# Altium PCB mainboardDory.PcbDoc (part 1 of 2)
Units mil, origin at the board's own origin, x right, y up, seen from the top; angles counter-clockwise.
Board outline 5000 x 2698.04 mil, 2 copper layers (Top Layer, Bottom Layer); 85 components, 78 nets, 393 pads, 169 vias.
Unrouted connection lines stored in the file: 5.
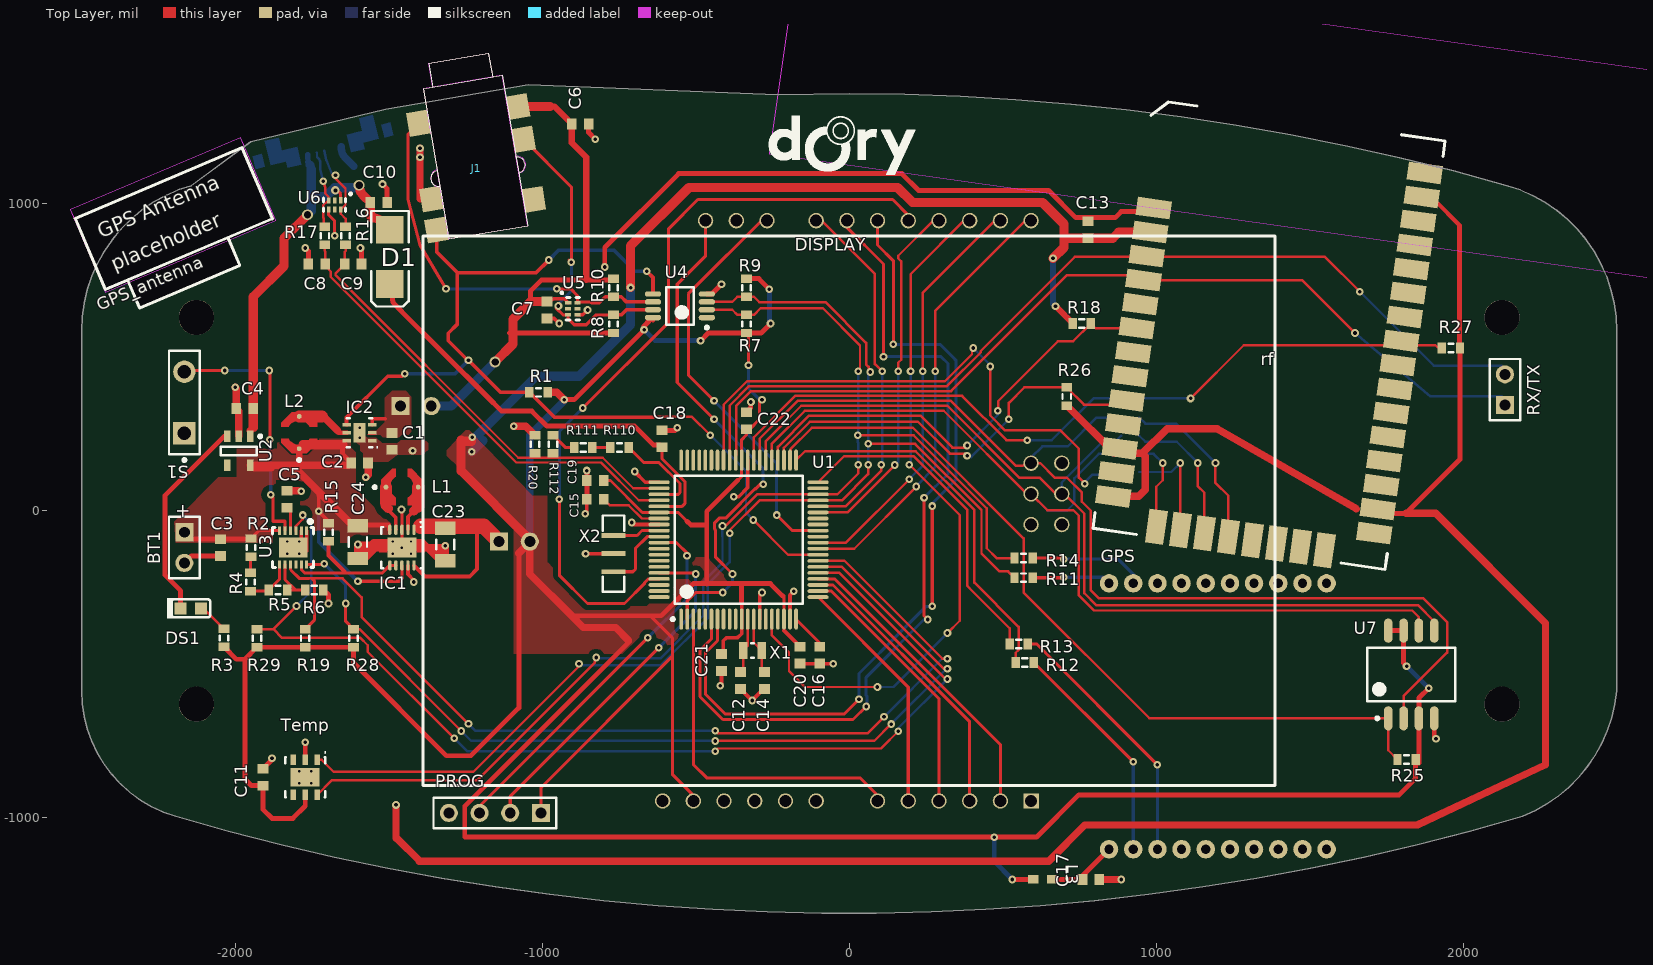
[diagram p0: Top Layer view]
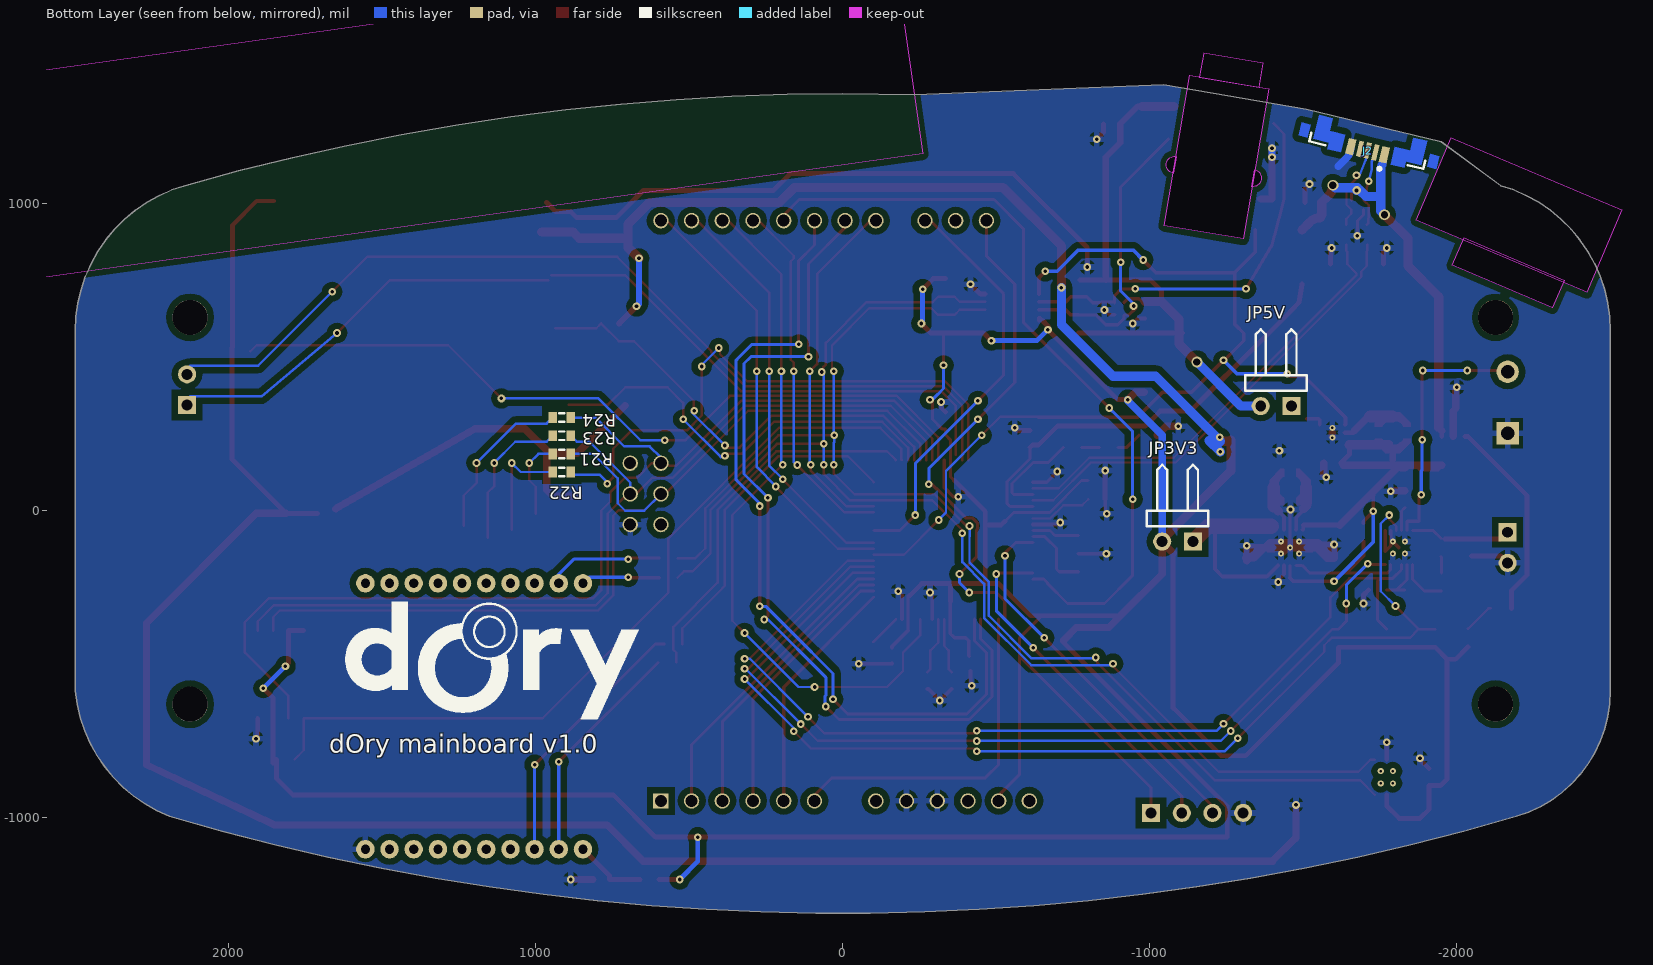
[diagram p1: Bottom Layer view, seen from below]

## Layer stack, top to bottom
Top Solder: solder mask 0.4, Solder Resist, Dk 3.5
Top Layer: signal copper 1.4
Dielectric 1: dielectric 12.6, FR-4, Dk 4.8
Bottom Layer: signal copper 1.4
Bottom Solder: solder mask 0.4, Solder Resist, Dk 3.5

## Board outline
-2142.54,1059.37 -2185.64,1044.92 -2227.22,1026.56 -2266.94,1004.44 -2304.44,978.75 -2339.41,949.72 -2371.55,917.57 -2400.59,882.6 -2426.28,845.1 -2448.4,805.39 -2466.77,763.8 -2481.21,720.7 -2491.62,676.45 -2497.9,631.43 -2500,586.02 -2500,-586.02 -2497.92,-628.14 -2491.69,-669.85 -2481.37,-710.74 -2467.07,-750.41 -2448.93,-788.47 -2427.11,-824.56 -2401.84,-858.32 -2373.36,-889.42 -2341.96,-917.56 -2307.93,-942.46 -2271.6,-963.88 -2233.34,-981.61 -2193.52,-995.48 -2022.28,-1043.67 -1849.99,-1087.92 -1676.73,-1128.23 -1502.59,-1164.57 -1327.67,-1196.92 -1152.05,-1225.26 -975.83,-1249.58 -799.1,-1269.86 -621.96,-1286.1 -444.49,-1298.29 -266.79,-1306.42 -88.94,-1310.49 88.94,-1310.49 266.79,-1306.42 444.49,-1298.29 621.96,-1286.1 799.1,-1269.86 975.83,-1249.58 1152.05,-1225.26 1327.67,-1196.92 1502.59,-1164.57 1676.73,-1128.23 1849.99,-1087.92 2022.28,-1043.67 2193.52,-995.48 2234.29,-976.91 2273.21,-954.71 2309.94,-929.06 2344.2,-900.18 2375.68,-868.3 2404.13,-833.69 2429.32,-796.64 2451.03,-757.45 2469.09,-716.45 2483.34,-673.97 2493.67,-630.38 2500,-586.02 2500,586.02 2497.9,631.43 2491.62,676.45 2481.21,720.7 2466.77,763.8 2448.41,805.39 2426.29,845.1 2400.59,882.6 2371.55,917.57 2339.41,949.72 2304.44,978.75 2266.93,1004.44 2227.22,1026.56 2185.64,1044.92 2142.54,1059.37 1968.03,1106.84 1792.48,1150.27 1615.97,1189.64 1438.59,1224.91 1260.45,1256.09 1081.64,1283.14 902.25,1306.05 722.38,1324.81 542.12,1339.42 361.57,1349.85 180.84,1356.12 0,1358.21 -232.34,1354.76 -1044.77,1387.55 -1509.14,1308.05 -1949.23,1201.71

## Design rules (kind name [scope] priority, off if disabled: settings)
AssemblyTestPointUsage SilkToBoardRegionClearance [All] p2:
Clearance Clearance_1 [InNamedPolygon('3v3poly')] p1: gap=16
Clearance VsysClearance [InNamedPolygon('vsysBATT')] p2: gap=20
Clearance GNDClearance [InNamedPolygon('Bottom_GND')] p3: gap=20
Clearance [All] p4: gap=6
DiffPairsRouting DiffPairUSB_DiffPairsRouting [InDifferentialPair ('USBD') Or InDifferentialPair ('USB')] p1: maxlimit=7.5 minlimit=7.5 mostfreqgap=7.5 toplayer_minwidth=7.5 toplayer_maxwidth=7.5 toplayer_prefwidth=7.5 bottomlayer_minwidth=7.5 bottomlayer_maxwidth=7.5 bottomlayer_prefwidth=7.5 maxuncoupledlength=500
DiffPairsRouting [All] p2: maxlimit=10 minlimit=7.5 mostfreqgap=7.5 toplayer_minwidth=7.5 toplayer_maxwidth=10 toplayer_prefwidth=7.5 bottomlayer_minwidth=7.5 bottomlayer_maxwidth=10 bottomlayer_prefwidth=7.5 maxuncoupledlength=150
HoleSize [All] p1: absolutevalues=TRUE maxlimit=250 minlimit=11.81 maxpercent=80.000 minpercent=20.000
MatchedLengths DiffPairUSB_MatchedLengths [InDifferentialPair ('USBD') Or InDifferentialPair ('USB')] p1: tolerance=100 checknetsindiffpair=TRUE checkdiffpairvsdiffpair=FALSE checkothers=FALSE
MatchedLengths DiffPair_DIFF100MatchedLengths [InDifferentialPairClass('DIFF100')] p2: tolerance=100 checknetsindiffpair=TRUE checkdiffpairvsdiffpair=FALSE checkothers=FALSE
MinimumAnnularRing [All] p1: minimumring=6
MinimumSolderMaskSliver [All] p1: minsoldermaskwidth=6
MinimumSolderMaskSliver SilkscreenOverComponentPads_1 [All] p2: minsoldermaskwidth=10
MinimumSolderMaskSliver SilkToSolderMaskClearance [IsPad] p3: minsoldermaskwidth=6
MinimumSolderMaskSliver SilkscreenOverComponentPads [All] p4: minsoldermaskwidth=10
PlaneClearance VSYSClearanceRule [InNet('V_SYS')] p1: clearance=20
PlaneClearance [All] p2: clearance=20
PolygonConnect GNDPlaneConnectRule [All vs IsNamedPolygon('Bottom_GND')] p1: connectstyle=Relief reliefconductorwidth=20 reliefentries=4 polygonreliefangle="90 Angle" airgapwidth=12
PolygonConnect [All] p2: connectstyle=Direct reliefconductorwidth=10 reliefentries=4 polygonreliefangle="90 Angle" airgapwidth=10
RoutingVias PowerVias [InNet('+5')        or InNet('5Vout')] p1: holewidth=23.62 width=35.43 viastyle="Through Hole" minholewidth=11.81 minwidth=25 maxholewidth=59.06 maxwidth=98.43
RoutingVias [All] p2: holewidth=11.81 width=25 viastyle="Through Hole" minholewidth=11.81 minwidth=25 maxholewidth=28 maxwidth=50
SilkToBoardRegionClearance SilkToBoardRegionClearance_1 [All] p1:
SilkToSilkClearance [All] p1: silktosilkclearance=0
SilkToSolderMaskClearance SilkToSolderMaskClearance_1 [IsPad] p1: minsilkscreentomaskgap=0 clearancetoexposedcopper=TRUE
SolderMaskExpansion [All] p1: expansion=4
Width Width_5V [(InNet('+5') OR InNet('5VOUT'))   OR InNet('V_sys')] p1: maxlimit=50 minlimit=10 preferedwidth=16 minimp=50.000000 maximp=50.000000 favimp=50.000000
Width Width_GND [InNet('GND')] p2: maxlimit=50 minlimit=10 preferedwidth=16 bottomlayer_minwidth=12 minimp=50.000000 maximp=50.000000 favimp=50.000000
Width Width_3V3 [InNet('VCC')] p3: maxlimit=50 minlimit=8 preferedwidth=12 minimp=50.000000 maximp=50.000000 favimp=50.000000
Width [All] p4: maxlimit=100 minlimit=7 preferedwidth=10 minimp=50.000000 maximp=50.000000 favimp=50.000000
22 further rules are at their usual default settings.

## Classes and differential pairs
net class highSpeed: RX_FROM_GPS RX_FROM_ZIGBEE SCL SCL5V SDA SDA5V SPI_MISO SPI_MOSI SPI_SCK TX_TO_GPS TX_TO_ZIGBEE
net class POWER: 5VOUT +5 V_SYS
differential pair class DIFF90: USB USBD
differential pair USBD: +USBD_P -USBD_N
differential pair USB: +USB_P -USB_N

## Components (designator, comment, footprint, x,y, rotation, side; value= is the part's Value field where it differs from the comment)
BT1 "Battery" BAT-2 -2165.35,-119.8 r270 top
C1 "Cap Semi" 1608[0603] -1489,226 r90 top
C2 "Cap Semi" 1608[0603] -1594.49,155.8 r180 top
C3 "Cap Semi" 1608[0603] -2047.24,-119.8 r90 top
C4 "Cap Semi" 1608[0603] -1968.5,332.96 r0 top
C5 "Cap Semi" 1608[0603] -1830.71,37.68 r270 top
C6 "Cap Semi" 1608[0603] -875.98,1259.84 r180 top
C7 "Cap Semi" 1608[0603] -984,654 r90 top
C8 "Cap Semi" 1608[0603] -1733.87,803.2 r0 top
C9 "Cap Semi" 1608[0603] -1615.76,803.2 r180 top
C10 "Cap Semi" 1608[0603] -1532.58,1004.36 r180 top
C11 "Cap Semi" 1608[0603] -1909.45,-867.83 r270 top
C12 "Cap Semi" 1608[0603] -354.33,-552.87 r90 top
C13 "Cap Semi" 1608[0603] 777.56,915.35 r270 top
C14 "Cap Semi" 1608[0603] -275.59,-552.87 r90 top
C15 "Cap Semi" 1608[0603] -826.77,37.68 r180 top
C16 "Cap Semi" 1608[0603] -96,-470 r270 top
C17 "Cap Semi" 1608[0603] 787.4,-1200.79 r180 top
C18 "Cap Semi" 1608[0603] -610.24,234.54 r270 top
C19 "Cap Semi" 1608[0603] -826.77,98.43 r180 top
C20 "Cap Semi" 1608[0603] -160,-470 r90 top
C21 "Cap Semi" 1608[0603] -416,-494 r90 top
C22 "Cap Semi" 1608[0603] -334.65,293.59 r270 top
C23 "Cap Semi" C1206 -1316,-110 r90 top
C24 "Cap Semi" C1206 -1600,-102 r270 top
D1 "D Schottky" SMB -1496.06,826.77 r270 top
DISPLAY "Seeed Studio Display Shield" "Display shield" 0,0 r180 top locked
DS1 "TLSU1008A(T04)" TOSH-0603LED_RED_V -2144,-318 r0 top
GPS "GPS Bee Seeedstudio" "GPS bee" 1437.01,-708.66 r90 top locked
GPS_antenna "GPS_ant_dummy" GPS_ant_dummy -2150.39,835.83 r23 top locked
IC1 "TPS63001DRCR" DRC10-2400X1650TP -1456.69,-119.8 r270 top
IC2 "TPS61240DRVT" DRV6-1600X1000TP -1594.49,254.22 r180 top
J1 "Jack_6" Jack_6_socket -1258.66,1396.06 r279.64 top locked
J2 "micro_USB" DX4RNW5HJ3 -1729.13,1254.72 r13.6 bottom locked
JP3V3 "Header 2H" HDR1X2H -1140.16,-100.11 r0 bottom
JP5V "Header 2H" HDR1X2H -1461,341 r0 bottom
L1 "SRU2013-2R2Y" BOUR-SRU2013-2R2Y-2_V -1456.69,77.05 r90 top
L2 "SRU2013-1R0Y" BOUR-SRU2013-2R2Y-2_V -1791.34,254.22 r180 top
L3 "742861210" SMD-0603 629.92,-1200.79 r0 top
PROG "Header 4" HDR1X4 -1003.94,-984.25 r180 top
R1 "Res3" J1-0603 -1012,386 r180 top
R2 "Res3" J1-0603 -1948.82,-119.8 r90 top
R3 "Res3" J1-0603 -2036,-414 r90 top
R4 "Res3" J1-0603 -1950,-232 r90 top
R5 "Res3" J1-0603 -1860.24,-257.59 r180 top
R6 "Res3" J1-0603 -1742.13,-257.59 r180 top
R7 "Res3" J1-0603 -334.65,608.55 r270 top
R8 "Res3" J1-0603 -767.72,608.55 r270 top
R9 "Res3" J1-0603 -334.65,726.66 r90 top
R10 "Res3" J1-0603 -767.72,726.66 r90 top
R11 "Res3" J1-0603 568,-218 r0 top
R12 "Res3" J1-0603 572,-494 r180 top
R13 "Res3" J1-0603 552,-434 r180 top
R14 "Res3" J1-0603 568,-154 r0 top
R15 "Res3" J1-0603 -1696,-70 r90 top
R16 "Res3" J1-0603 -1639.89,896.11 r270 top
R17 "Res3" J1-0603 -1707.89,896.11 r270 top
R18 "Res3" J1-0603 757.87,610.24 r0 top
R19 "Res3" J1-0603 -1771.65,-415.07 r270 top
R20 "Res3" J1-0603 -1023.62,216.54 r90 top
R21 "Res3" J1-0603 915.35,185.32 r0 bottom
R22 "Res3" J1-0603 915.35,126.27 r0 bottom
R23 "Res3" J1-0603 915.35,244.38 r0 bottom
R24 "Res3" J1-0603 915.35,303.43 r0 bottom
R25 "Res3" J1-0603 1815.46,-810 r0 top
R26 "Res3" J1-0603 708.66,372.33 r90 top
R27 "Res3" J1-0603 1960,530 r180 top
R28 "Res3" J1-0603 -1614.17,-415.07 r270 top
R29 "Res3" J1-0603 -1929.13,-415.07 r270 top
R110 "Res3" J1-0603 -748.03,206.69 r180 top
R111 "Res3" J1-0603 -866.14,206.69 r180 top
R112 "Res3" J1-0603 -964.57,216.54 r270 top
rf "XBee ZigBee S2C surface mount" "S2C XBEE" 1024.61,1220.47 r352 top locked
RX/TX "Header 2" HDR1X2 2135.83,344.49 r90 top
S1 "SW-PB" SPST-2 -2165.35,352.65 r90 top
Temp "Si7055" Si7050/3/4/5 -1771.65,-867.83 r270 top
U1 "MSP430F5529IPN" TI-PN80_N -360,-94 r90 top
U2 "MAX1555EZK-T" MAXM-Z5-1_N -1988.19,195.17 r270 top
U3 "LTC2953IDD-1#PBF" LT-DD-12_V -1811.02,-119.8 r270 top
U4 "PCA9515DP" TSOP65P490X110-8N -551.18,667.61 r180 top
U5 "TPD2E001DRYR" DRY6 -900,658 r0 top
U6 "TPD2E001DRYR" DRY6 -1675.89,996.11 r270 top
U7 "SST25VF064C-80-4I-S3AE" MCHP-SOIC-S3A8_M 1830.71,-533.18 r90 top
X1 "FC - 12M 32.768kHz crystal" FC-12M -314.96,-454.44 r180 top
X2 "CSTCR4M00G15L99" CSTCR_G15L -767.72,-139.48 r270 top

## Footprints (in the part's own frame and the unit in brackets; to place one, negate y for a bottom-side part, rotate by r counter-clockwise, add the part's x,y. Pads: shape width x height; smd on the part's side, far side on the other; paste and mask are expansions set on the pad)
1608[0603] [mm] "Chip Capacitor, Body 1.6x0.8mm, IPC High Density"
  rect 0.8x0.9 smd: 1(-0.7,0) 2(0.7,0)
  body extent -0.87,-0.48 0.87,0.48, height 1.3
BAT-2 [mm] "Battery; 2 Leads"
  rect 1.5x1.5 hole 0.9: 1(-1.27,0)
  round 1.5 hole 0.9: 2(1.27,0)
  silkscreen extent -2.54,-1.27 2.54,1.27
BOUR-SRU2013-2R2Y-2_V [mm] "Hand Drawn, 2-Leads, Body 2.8x2.8mm"
  round 0.4 smd: 1(0,1.321) 2(0,-1.346)
  Top Layer region: 1.5,-0.5 1.5,-0.5 1.5,-0.5 1.5,-0.5 1.5,-0.5 1.5,-0.5 1.5,-0.82 1.5,-0.82 1.5,-0.82 1.5,-0.82 0.62,-1.7 0.62,-1.7 0.62,-1.7 0.62,-1.7 0.62,-1.7 0.62,-1.7 0.62,-1.7 -0.62,-1.7 -0.62,-1.7 -0.62,-1.7 -0.62,-1.7 -1.5,-0.82 -1.5,-0.82 -1.5,-0.82 -1.5,-0.82 -1.5,-0.5 -1.5,-0.5 -1.5,-0.5 -1.5,-0.5 -1.5,-0.5 -1.5,-0.5 -0.866,-0.5 -0.866,-0.5 -0.866,-0.5 -0.866,-0.5 -0.866,-0.5 -0.866,-0.5 -0.866,-0.5 -0.866,-0.5 -0.866,-0.5 -0.5,-0.866 0,-1 0.5,-0.866 0.866,-0.5 0.866,-0.5 0.866,-0.5 0.866,-0.5 0.866,-0.5 0.866,-0.5 0.866,-0.5 0.866,-0.5 0.866,-0.5 0.866,-0.5
  Top Layer region: -1.5,0.5 -1.5,0.5 -1.5,0.5 -1.5,0.5 -1.5,0.5 -1.5,0.5 -1.5,0.82 -1.5,0.82 -1.5,0.82 -1.5,0.82 -0.62,1.7 -0.62,1.7 -0.62,1.7 -0.62,1.7 -0.62,1.7 -0.62,1.7 -0.62,1.7 0.62,1.7 0.62,1.7 0.62,1.7 0.62,1.7 1.5,0.82 1.5,0.82 1.5,0.82 1.5,0.82 1.5,0.5 1.5,0.5 1.5,0.5 1.5,0.5 1.5,0.5 1.5,0.5 0.866,0.5 0.866,0.5 0.866,0.5 0.866,0.5 0.866,0.5 0.866,0.5 0.866,0.5 0.866,0.5 0.866,0.5 0.5,0.866 0,1 -0.5,0.866 -0.866,0.5 -0.866,0.5 -0.866,0.5 -0.866,0.5 -0.866,0.5 -0.866,0.5 -0.866,0.5 -0.866,0.5 -0.866,0.5 -0.866,0.5
  silkscreen extent -0.13,2.13 0.12,2.37, body extent -1.4,-1.4 1.4,1.4, height 1.5
C1206 [mm] "Chip Capacitor, Body 3.2x1.6mm, IPC High Density"
  rect 1.1x1.7 smd: 1(-1.35,0) 2(1.35,0)
  silkscreen extent -0.4,-0.75 0.4,0.75, body extent -1.7,-0.9 1.7,0.9, height 1.3
CSTCR_G15L [mm]
  rect 0.4x2 smd: 1(-1.5,0) 2(0,0) 3(1.5,0)
  silkscreen extent -3.15,-0.9 3.15,0.9
"Display shield" [mil]
  round 50 hole 39: 3V3(507.5,945) 5V(407.5,945) A0(-92.5,945) A1(-192.5,945) A2(-292.5,945) A3(-392.5,945) A4(-492.5,945) D0(-592.5,-945) D1(-492.5,-945) D2(-392.5,-945) D3(-292.5,-945) D4(-192.5,-945) D5(-92.5,-945) D6(7.5,-945) D7(107.5,-945) D8(267.5,-945) D9(367.5,-945) D10(467.5,-945) GND0(207.5,945) GND1(307.5,945) GND2(-692.5,45) MISO(-592.5,-155) MOSI(-692.5,-55) NC0(-692.5,-155) NC1(-592.5,45) RST(607.5,945) SCK(-592.5,-55) VIN(107.5,945)
  rect 50x50 hole 39: A5(-592.5,945)
  silkscreen extent -1388,-895 1388,895
DRC10-2400X1650TP [mm] "SON, 10-Leads, Body 3x3mm, Pitch 0.5mm, Thermal Pad 2.4x1.65mm, TI Recommended"
  oval 0.85x0.28 smd paste-0.025 mask+0.07: 1(-1.475,1) 2(-1.475,0.5) 3(-1.475,0) 4(-1.475,-0.5) 5(-1.475,-1) 6(1.475,-1) 7(1.475,-0.5) 8(1.475,0) 9(1.475,0.5) 10(1.475,1)
  rect 1.65x2.4 smd paste-0.825 mask+0.07: 11(0,0)
  Top Layer region: -0.391,1.2 -0.111,1.2 -0.111,1.9 -0.391,1.9
  Top Layer region: 0.389,1.9 0.109,1.9 0.109,1.2 0.389,1.2
  Top Layer region: -0.391,-1.9 -0.111,-1.9 -0.111,-1.2 -0.391,-1.2
  Top Layer region: 0.389,-1.2 0.109,-1.2 0.109,-1.9 0.389,-1.9
  silkscreen extent -2.15,-1.7 1.7,1.7, body extent -1.55,-1.55 1.55,1.55, height 1
DRV6-1600X1000TP [mm] "SON, 6-Leads, Body 2x2mm, Pitch 0.65mm, Thermal Pad 1.6x1mm, TI Recommended"
  rect 0.7x0.3 smd paste-0.025 mask+0.07: 1(-1.05,0.65) 2(-1.05,0) 3(-1.05,-0.65) 4(1.05,-0.65) 5(1.05,0) 6(1.05,0.65)
  rect 1x1.6 smd paste-0.5 mask+0.07: 7(0,0)
  silkscreen extent -1.5,-1.2 1.05,1.25, body extent -1.05,-1.05 1.05,1.05, height 0.8
DRY6 [mm] "PSON, 6-Leads, Body 1x1.45mm, Pitch 0.5mm, TI Recommended"
  rect 0.52x0.3 smd paste+0 mask+0.05: 1(-0.385,0.5)
  rect 0.49x0.3 smd paste+0 mask+0.05: 2(-0.385,0) 3(-0.385,-0.5) 4(0.385,-0.5) 5(0.385,0) 6(0.385,0.5)
  silkscreen extent -0.96,-0.91 0.56,1.37, body extent -0.53,-0.75 0.53,0.75, height 0.6
DX4RNW5HJ3 [mm] "USB Micro-AB Connector, 5-Leads, Pitch 0.65mm"
  rect 0.65x1.35 smd: 1(-1.425,2.137) 5(1.425,2.137)
  rect 0.4x1.35 smd: 2(-0.65,2.137) 3(0,2.137) 4(0.65,2.137)
  Top Layer region: -4.61,2.275 -2.1,2.275 -2.1,1.275 -4.61,1.275
  Top Layer region: -4.61,2.275 -3.41,2.275 -3.41,0.175 -4.61,0.175
  Top Layer region: 3.41,2.275 4.61,2.275 4.61,0.175 3.41,0.175
  Top Layer region: 2.1,2.275 4.61,2.275 4.61,1.275 2.1,1.275
  Top Layer region: -3.3,2.825 -2.1,2.825 -2.1,1.275 -3.3,1.275
  Top Layer region: 2.1,2.825 3.3,2.825 3.3,1.275 2.1,1.275
  Top Layer region: 5.075,2.275 5.85,2.275 5.85,1.125 5.075,1.125
  Top Layer region: -5.9,2.3 -5.075,2.3 -5.075,1.15 -5.9,1.15
  silkscreen extent -4.83,1.81 4.87,3.49, body extent -5.75,-3.3 5.75,2.58, height 3.92
FC-12M [mm] "Epson kHz range crystal unit"
  rect 0.7x1.4 smd: 1(-0.75,0) 2(0.75,0)
  silkscreen extent -0.1,-0.6 0.1,0.6, body extent -1.05,-0.63 1.05,0.63, height 0.6
"GPS bee" [mil]
  round 60 hole 30: 1(-393.7,590.55) 2(-393.7,511.81) 3(-393.7,433.07) 4(-393.7,354.33) 5(-393.7,275.59) 6(-393.7,196.85) 7(-393.7,118.11) 8(-393.7,39.37) 9(-393.7,-39.37) 10(-393.7,-118.11) 11(472.44,-118.11) 12(472.44,-39.37) 13(472.44,39.37) 14(472.44,118.11) 15(472.44,196.85) 16(472.44,275.59) 17(472.44,354.33) 18(472.44,433.07) 19(472.44,511.81) 20(472.44,590.55)
  body extent -443,-203 522,896, height 138
GPS_ant_dummy [mil]
  Keep-Out Layer board cut-out: -216.54,-98.43 137.8,-98.43 137.8,0 -216.54,0
  Keep-Out Layer board cut-out: -299.21,-7.87 303.15,-7.87 303.15,283.46 -299.21,283.46
  silkscreen extent -295,-98 295,252, body extent -295,0 295,252, height 354
HDR1X2 [mm] "Connector; Header; 2 Position"
  rect 1.5x1.5 hole 0.9: 1(0,0)
  round 1.5 hole 0.9: 2(2.54,0)
  silkscreen extent -1.27,-1.27 3.81,1.27
HDR1X2H [mm] "Connector; Header; 2 Position; Right Angle"
  rect 1.5x1.5 hole 0.9: 1(0,0)
  round 1.5 hole 0.9: 2(2.54,0)
  silkscreen extent -1.27,-6.35 3.81,-1.27
HDR1X4 [mm] "Connector; Header; 4 Position"
  rect 1.5x1.5 hole 0.9: 1(0,0)
  round 1.5 hole 0.9: 2(2.54,0) 3(5.08,0) 4(7.62,0)
  silkscreen extent -1.27,-1.27 8.89,1.27
J1-0603 [mm] "Chip Resistor, Body 1.6x0.8mm, IPC High Density"
  rect 0.7x0.9 smd: 1(-0.75,0) 2(0.75,0)
  silkscreen extent -0.2,-0.35 0.2,0.35, body extent -0.85,-0.48 0.85,0.48, height 0.9
Jack_6_socket [mm] "jack with 8 connectors Seeed SKU 32004003 (ST-PJ-930A)"
  rect 2x1.75 smd: 1(2.75,4.175) 2(9.1,-4.175) 3(5.5,4.175) 4(2.75,-4.175) 5(11.7,-4.175) 6(10.55,4.175)
  Keep-Out Layer board cut-out: 0,2.5 0,-2.5 -2,-2.5 -2,2.5
  Keep-Out Layer board cut-out: 0,-3.3 12.6,-3.3 12.6,3.3 0,3.3
  Keep-Out Layer board cut-out: 8.2,-3.3 6.8,-3.3 6.903,-3.634 7.159,-3.872 7.5,-3.95 7.5,-3.95 7.841,-3.872 8.097,-3.634 8.2,-3.3
  Keep-Out Layer board cut-out: 6.8,3.3 8.2,3.3 8.2,3.3 8.147,3.568 7.995,3.795 7.768,3.947 7.5,4 7.5,4 7.232,3.947 7.005,3.795 6.853,3.568 6.8,3.3
  silkscreen extent -2,-3.95 12.6,3.95, body extent -2,-4.55 12,4.55, height 1.9
LT-DD-12_V [mm] "SON, 12-Leads, Body 3x3mm, Pitch 0.45mm, Thermal Pad 2.38x1.65mm"
  rect 0.7x0.25 smd: 1(-1.4,1.125) 2(-1.4,0.675) 3(-1.4,0.225) 4(-1.4,-0.225) 5(-1.4,-0.675) 6(-1.4,-1.125) 7(1.4,-1.125) 8(1.4,-0.675) 9(1.4,-0.225) 10(1.4,0.225) 11(1.4,0.675) 12(1.4,1.125)
  rect 1.65x2.38 smd: 13(0,0)
  silkscreen extent -2.1,1.5 -2,1.6, body extent -1.5,-1.5 1.5,1.5, height 0.8
MAXM-Z5-1_N [mm] "SOT23, 5-Leads, Body 3x1.65mm, Pitch 0.95mm, IPC Medium Density"
  rect 0.95x0.55 smd: 1(-1.2,0.95) 2(-1.2,0) 3(-1.2,-0.95) 4(1.2,-0.95) 5(1.2,0.95)
  silkscreen extent -1.32,-1.5 0.35,1.9, body extent -0.82,-1.5 0.82,1.5, height 1.1
MCHP-SOIC-S3A8_M [mm] "SOIC, 8-Leads, Body 7.21x5.28mm, Pitch 1.27mm, IPC Low Density"
  oval 2x0.7 smd: 1(-3.625,1.905) 2(-3.625,0.635) 3(-3.625,-0.635) 4(-3.625,-1.905) 5(3.625,-1.905) 6(3.625,-0.635) 7(3.625,0.635) 8(3.625,1.905)
  silkscreen extent -3.75,-3.65 2.23,3.65, body extent -2.7,-3.65 2.7,3.65, height 2.16
"S2C XBEE" [mil]
  rect 112x60 smd: 1(0,-237) 2(0,-316) 3(0,-395) 4(0,-474) 5(0,-553) 6(0,-632) 7(0,-711) 8(0,-790) 9(0,-869) 10(0,-948) 11(0,-1027) 12(0,-1106) 13(0,-1185) 22(859,-1185) 23(859,-1106) 24(859,-1027) 25(859,-948) 26(859,-869) 27(859,-790) 28(859,-711) 29(859,-632) 30(859,-553) 31(859,-474) 32(859,-395) 33(859,-316) 34(859,-237) 35(859,-158) 36(859,-79) 37(859,0)
  rect 60x112 smd: 14(153,-1263) 15(232,-1263) 16(311,-1263) 17(390,-1263) 18(469,-1263) 19(548,-1263) 20(627,-1263) 21(706,-1263)
  Keep-Out Layer region: -1263.78,-236.22 2043.31,-236.22 2043.31,433.07 -1263.78,433.07
  silkscreen extent -51,-1297 910,112, body extent -51,-1310 907,66, height 120
Si7050/3/4/5 [mm] "I2C Temperature sensor SON, 6-Leads, Body 3.00x3.00mm, Pitch 1.00mm, Thermal Pad 2.40x1.50mm, IPC Medium Density"
  rect 0.85x0.45 smd: 1(-1.45,1) 2(-1.45,0) 3(-1.45,-1) 4(1.45,-1) 5(1.45,0) 6(1.45,1)
  rect 1.5x2.4 smd: 7(0,0)
  silkscreen extent -2.1,-1.65 1.65,1.7, body extent -1.5,-1.5 1.5,1.5, height 0.85
SMB [mm] "DO-214-AA/SMB; 2 C-Bend Leads; Body 5.3 x 3.6 mm, inc. leads (LxW)"
  rect 2.3x2.3 smd: 1(-2.25,0) 2(2.25,0)
  silkscreen extent -3.8,-1.55 4.1,1.55
SMD-0603 [mm] "Chip Inductor, 2-Leads, Body 1.6x0.8mm"
  rect 0.85x0.7 smd: 1(-0.775,0) 2(0.775,0)
  body extent -0.8,-0.4 0.8,0.4, height 0.79
SPST-2 [mm] "Switch; 2 Leads"
  rect 1.85x1.85 hole 1.1: 1(-2.54,0)
  round 1.85 hole 1.1: 2(2.54,0)
  silkscreen extent -4.89,-1.27 4.28,1.27
TI-PN80_N [mm] "QFP, 80-Leads, Body 12x12mm, Pitch 0.5mm, IPC Medium Density"
  oval 1.75x0.3 smd: 1(-6.575,4.75) 2(-6.575,4.25) 3(-6.575,3.75) 4(-6.575,3.25) 5(-6.575,2.75) 6(-6.575,2.25) 7(-6.575,1.75) 8(-6.575,1.25) 9(-6.575,0.75) 10(-6.575,0.25) 11(-6.575,-0.25) 12(-6.575,-0.75) 13(-6.575,-1.25) 14(-6.575,-1.75) 15(-6.575,-2.25) 16(-6.575,-2.75) 17(-6.575,-3.25) 18(-6.575,-3.75) 19(-6.575,-4.25) 20(-6.575,-4.75) 41(6.575,-4.75) 42(6.575,-4.25) 43(6.575,-3.75) 44(6.575,-3.25) 45(6.575,-2.75) 46(6.575,-2.25) 47(6.575,-1.75) 48(6.575,-1.25) 49(6.575,-0.75) 50(6.575,-0.25) 51(6.575,0.25) 52(6.575,0.75) 53(6.575,1.25) 54(6.575,1.75) 55(6.575,2.25) 56(6.575,2.75) 57(6.575,3.25) 58(6.575,3.75) 59(6.575,4.25) 60(6.575,4.75)
  oval 0.3x1.75 smd: 21(-4.75,-6.575) 22(-4.25,-6.575) 23(-3.75,-6.575) 24(-3.25,-6.575) 25(-2.75,-6.575) 26(-2.25,-6.575) 27(-1.75,-6.575) 28(-1.25,-6.575) 29(-0.75,-6.575) 30(-0.25,-6.575) 31(0.25,-6.575) 32(0.75,-6.575) 33(1.25,-6.575) 34(1.75,-6.575) 35(2.25,-6.575) 36(2.75,-6.575) 37(3.25,-6.575) 38(3.75,-6.575) 39(4.25,-6.575) 40(4.75,-6.575) 61(4.75,6.575) 62(4.25,6.575) 63(3.75,6.575) 64(3.25,6.575) 65(2.75,6.575) 66(2.25,6.575) 67(1.75,6.575) 68(1.25,6.575) 69(0.75,6.575) 70(0.25,6.575) 71(-0.25,6.575) 72(-0.75,6.575) 73(-1.25,6.575) 74(-1.75,6.575) 75(-2.25,6.575) 76(-2.75,6.575) 77(-3.25,6.575) 78(-3.75,6.575) 79(-4.25,6.575) 80(-4.75,6.575)
  silkscreen extent -6.7,-5.3 5.3,5.57, body extent -6,-6 6,6, height 1.6
TOSH-0603LED_RED_V [mm] "SMT LED, 2-Leads, Body 1.6x0.8mm (0603-Size)"
  rect 1x1 smd paste+0 mask+0: 1(0.85,0) 2(-0.85,0)
  silkscreen extent -1.97,-0.85 1.6,0.85, body extent -0.92,-0.53 1.09,0.53, height 0.6
TSOP65P490X110-8N [mm] "TSOP, 8-Leads, Body 3.00x3.00mm, Pitch 0.65mm, IPC Medium Density"
  oval 1.35x0.45 smd: 1(-2.225,0.975) 2(-2.225,0.325) 3(-2.225,-0.325) 4(-2.225,-0.975) 5(2.225,-0.975) 6(2.225,-0.325) 7(2.225,0.325) 8(2.225,0.975)
  silkscreen extent -2.35,-1.55 1.15,1.92, body extent -1.55,-1.55 1.55,1.55, height 1.1

## Part data
BT1: "Multicell Battery"
C1 C2 C3 C4 C5 C6 C7 C8 C9 C10 C11 C12 C13 C14 C15 C16 C17 C18 C19 C20 C21 C22 C23 C24: "Capacitor (Semiconductor SIM Model)"
D1: "Schottky Diode"
DS1: library part CMP-0444-00001-1, "LED, Red 0603 (1608) 63mCd"
IC1: library part CMP-0345-00006-1, "Buck-Boost Voltage Converter with 1.8 to 5.5 V Input and 3.3 V Output, -40 to 85 degC, 10-Pin SON (DRC), Green (RoHS & no Sb/Br)"
IC2: library part CMP-0343-00063-1, "Boost Voltage Converter with 2.3 to 5.5 V Input and 5 V Output, 6-Pin SON (DRV), Green (RoHS & no Sb/Br)"
J1: "4 pin 6 contact headphone jack 3.5mm"
J2: "waterproof USB 2.0 Standard Micro-USB Connector, Micro AB-Standard (Bottom Mount), 30 V AC, -30 to 85 degC, Right Angle, 5-Pin 7.5 x 5.6 x 2.8 mm SMD, RoHS,"
JP3V3 JP5V: "Header, 2-Pin, Right Angle"
L1 L2: library part CMP-0462-00001-2, "Power Inductor, 2.2 µH, 1.45 Irms Max(A), SMD"
L3: library part CMP-0220-00121-1, "SMD EMI Suppression Ferrite Bead WE-CBF HF, Z = 1000 Ohm"
PROG: "Header, 4-Pin"
R1 R2 R3 R4 R5 R6 R7 R8 R9 R10 R11 R12 R13 R14 R15 R16 R17 R18 R19 R20 R21 R22 R23 R24 R25 R26 R27 R28 R29 R110 R111 R112: "Resistor"
RX/TX: "Header, 2-Pin"
S1: "Switch"
U1: library part CMP-0365-00412-1, "25 MHz Mixed Signal Microcontroller with 128 KB Flash, 8192 B SRAM and 63 GPIOs, -40 to 85 degC, 80-pin QFP (PN), Green (RoHS & no Sb/Br)"
U2: library part CMP-0246-00653-1, "Dual-Input USB/AC Adapter 1-Cell Li+ Battery Charger, 4.2 V Charger Voltage, 0.28 A DC Charging Current, 5-Pin SOT23 Package, Tape and Reel"
U3: library part CMP-0482-00128-1, "Push Button On / Off Controller with Voltage Monitoring, 12-pin SON (DD-12), -40 to 85 degC, Pb-Free"
U4: "PCA9515 I2C logic level converter"
U5 U6: library part TI-TPD2E001-SON_DRY-6, "Low-Capacitance + / - 15 kV ESD-Protection Array for High-Speed Data Interfaces, 2 Channels, -40 to +85 degC, 6-pin SON (DRY), Green (RoHS & no Sb/Br)"
U7: library part CMP-0378-00064-1, "64 Mbit SPI Serial Flash, 2.7 to 3.6 V, 80 MHz, -40 to 85 degC, 8-pin SOIC (S3A8), Tube"
X1: "Epson FC - 12M"
X2: library part MURATA-FILTER_CSTCR, "<b>Resonator</b><p> / Source: murata.co.jp"

## Free pads (board coordinates)
  round 114.17 hole 114.17: 1(-2125.98,-629.92) 1(-2125.98,629.92) 1(2125.98,-629.92) 1(2125.98,629.92)

## Via types
v1: diameter 25, hole 11.81, Top Layer to Bottom Layer, 150 vias
v2: diameter 19.68, hole 7.87, Top Layer to Bottom Layer, 15 vias
v3: diameter 35.43, hole 23.62, Top Layer to Bottom Layer, 3 vias
v4: diameter 27.56, hole 11.81, Top Layer to Bottom Layer, 1 vias

## Nets (pads, with @x,y where several pads share a name; then routed paths per layer and width w, separated by ;. In a path a pad name is that pad's centre, name@x,y a point inside that pad or via, vN(x,y) a via of type N, cw(c..) or ccw(c..) an arc to the next point about the centre after c; other vN are vias at no path point)
5VENABLE: IC2.4 J1.5 R1.2 U1.28 U4.5 | length 3231.9
  Top Layer w8: -636,306 -512,306 v1(-452,246) ; v1(-312,-30) -198.79,-143.21 U1.28@-101.14,-143.21
  Top Layer w12: IC2.4@-1635.83,279.81 -1637.02,281 -1637.02,303.98 -1503,438 -1456,438 v1(-1448,446) ; J1.5@-1343.57,914.41 -1343.57,842.57 -1276,775 ; v1(-978,817) -1020,775 -1276,775 ; v1(-659,780) -638.78,759.78 U4.5@-638.78,705.99 ; -636,305.12 -960.65,305.12 R1.2@-1041.53,386 -1136,386 v1(-1240,490) -1242,490 -1306,554 -1306,578 -1276,608 -1276,775
  Bottom Layer w8: v1(-452,246) -336,130 -336,-6 v1(-312,-30)
  Bottom Layer w12: v1(-1448,446) -1284,446 v1(-1240,490) ; v1(-978,817) -946,849 -767,849 -698,780 v1(-659,780)
5VOUT: C6.2 C7.2 J1.1 JP5V.2 R8.2 R10.2 U5.1 | length 2022.5
  Top Layer w10: C7.2@-984,681.56 -972.68,681.56 -963.73,690.5 -927.97,690.5 U5.1@-915.16,677.68
  Top Layer w16: -1106,579.02 -1095,579.02 R8.2@-767.72,579.02 ; -1037.44,681.56 -1037.44,716.56 -1002.73,751.27 -856.3,751.27 R10.2@-772.64,751.27
  Top Layer w20: -974.41,1316.85 -960.55,1316.85 C6.2@-903.54,1259.84 -903.54,1198.82 -856.3,1151.57 -856.3,751.27
  Top Layer w30: v3(-1153,485) -1095,543 -1095,579.02 -1095,624 -1037.44,681.56 C7.2@-984,681.56 ; J1.1@-1078.48,1316.85 -974.41,1316.85
  Bottom Layer w30: JP5V.2@-1361,341 -1297,341 v3(-1153,485)
+5: C4.2 C10.2 D1.1 J2.1 U2.1 U6.1 | length 1612.4
  Top Layer w10: v4(-1673.23,1043.31) -1683.07,1043.31 -1683.07,1044.93 -1675.89,1052.11 -1656.2,1032.42 U6.1@-1656.2,1011.27
  Top Layer w16: U2.1@-1950.79,242.41 U2.1@-1950.79,261 ; C10.2@-1560.14,1004.36 C10.2@-1560.14,1016.36
  Top Layer w24: U2.1@-1950.79,261 -1940.95,270.84
  Top Layer w30: -1940.95,270.84 C4.2@-1940.95,332.96 -1940.95,696.85 -1840.55,797.24 -1840.55,887.45 v3(-1763.89,964.11) ; v3(-1595.89,1060.11) ccw(c-1547.61,1060.11) -1581.75,1025.97 C10.2@-1560.14,1004.36 -1560.14,966.85 ccw(c-1542.99,966.85) -1555.12,954.72 cw(c-1555.12,907.2) -1521.51,940.8 D1.1@-1496.06,915.35
  Bottom Layer w16: -1751.97,1131.89 cw(c-1770.39,1119.37) -1748.67,1114.45 ; v4@-1675.89,1052.11 -1674.12,1052.29 v3(-1595.89,1060.11) ; J2.1@-1761.89,1139.8 cw(c-1734.48,1150.44) -1763.88,1150.44 J2.1@-1763.88,1159.77 -1762.13,1159.77 -1762.13,1151.57 J2.1@-1761.89,1139.8 ; J2.1@-1761.89,1139.8 ccw(c-1734.48,1150.44) -1758.36,1133.28 ; J2.1@-1761.89,1139.8 -1761.81,1135.97 cw(c-1773.69,1117.13) -1758.36,1133.28 ; -1758.36,1133.28 cw(c-1773.69,1117.13) -1755.27,1129.65 cw(c-1734.48,1150.44) -1758.36,1133.28
  Bottom Layer w20: J2.1@-1761.81,1135.97 ccw(c-1728.21,1135.97) -1751.97,1112.2
  Bottom Layer w25: -1753.19,1115.16 ccw(c-1749.01,1115.16) -1751.97,1112.2 ccw(c-1756.15,1112.2) -1753.19,1115.16
  Bottom Layer w30: v3(-1763.89,964.11) -1751.97,976.03 -1751.97,1015.4 ; -1751.97,1112.2 -1751.97,1015.4 ; v4(-1673.23,1043.31) -1683.07,1043.31 v4@-1683.07,1044.93 ; v3(-1595.89,1060.11) -1603.89,1052.11 -1675.89,1052.11 v4@-1683.07,1044.93 ; -1751.97,1015.4 -1743.75,1023.62 -1704.38,1023.62 v4@-1683.07,1044.93
BTN0: DISPLAY.A1 U1.21 | length 767.6
  Top Layer w10: U1.21@-101.14,-281.01 192.5,-574.65 DISPLAY.A1@192.5,-927
BTN1: DISPLAY.A2 U1.22 | length 853.8
  Top Layer w10: U1.22@-101.14,-261.32 -58.27,-261.32 292.5,-612.09 DISPLAY.A2@292.5,-927
BTN2: DISPLAY.A3 U1.23 | length 918.3
  Top Layer w10: U1.23@-101.14,-241.64 -52.5,-241.64 392.5,-686.64 DISPLAY.A3@392.5,-927
BTN3: DISPLAY.A4 U1.24 | length 982.8
  Top Layer w10: U1.24@-101.14,-221.95 -46.73,-221.95 492.5,-761.18 DISPLAY.A4@492.5,-927